# Altium PCB Trans_V2.3.PcbDoc
Units mil, origin at the board's own origin, x right, y up, seen from the top; angles counter-clockwise.
Board outline 7874.02 x 3937.01 mil, 2 copper layers (Top Layer, Bottom Layer), stack 12.8 mil thick; 108 components, 89 nets, 455 pads, 118 vias.
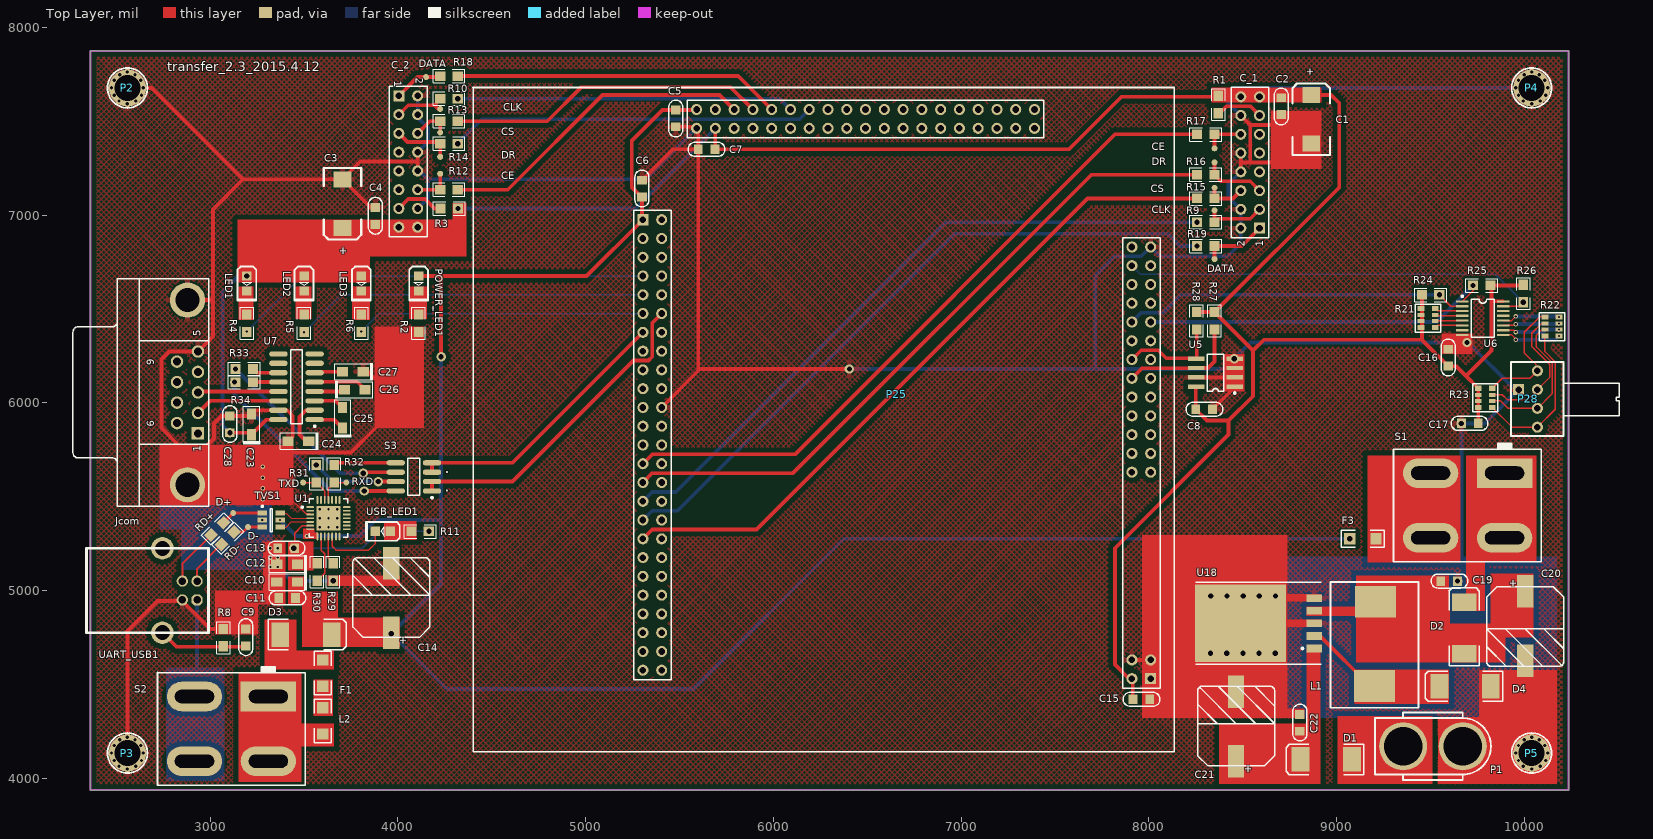
[diagram p0: Top Layer view]
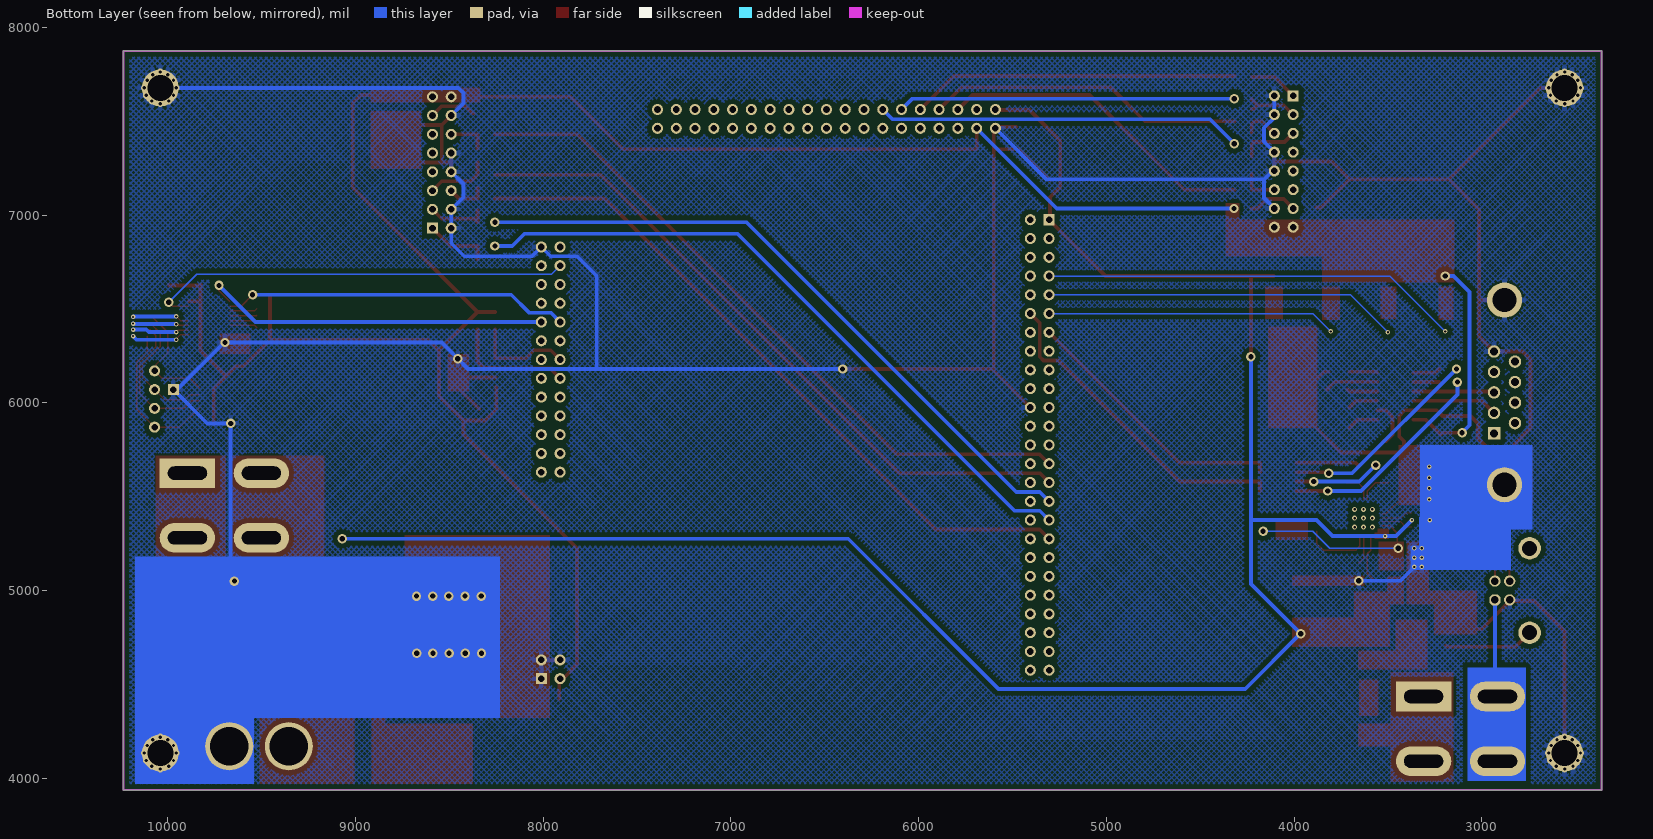
[diagram p1: Bottom Layer view, seen from below]

## Layer stack, top to bottom
Top Solder: solder mask 0.4, Solder Resist, Dk 3.5
Top Layer: signal copper 1.4
Dielectric1: core 10, FR-4, Dk 4.2
Bottom Layer: signal copper 1.4
Bottom Solder: solder mask 0.4, Solder Resist, Dk 3.5

## Board outline
2362.2,3937.01 10236.22,3937.01 10236.22,7874.02 2362.2,7874.02

## Design rules (kind name [scope] priority, off if disabled: settings)
Clearance Clearance_1 [InPolygon And InNet('GND')] p1: gap=25 ignorepadtopadclearanceinfootprint=FALSE except(0: Arc-Hole Track-Hole SMDPad-Hole THPad-Hole Via-Hole Fill-Hole Poly-Hole Region-Hole Text-Hole)
Clearance [All] p2: gap=6 ignorepadtopadclearanceinfootprint=FALSE except(0: Arc-Hole Track-Hole SMDPad-Hole THPad-Hole Via-Hole Fill-Hole Poly-Hole Region-Hole Text-Hole)
ComponentClearance [All] p1 off: gap=10 collisioncheckmode=3 verticalgap=10 showdistances=FALSE
DiffPairsRouting DiffPair_DiffPairsRouting [InDifferentialPair ('D3')] p1: maxlimit=6 minlimit=6 mostfreqgap=6 toplayer_minwidth=15 toplayer_maxwidth=15 toplayer_prefwidth=15 bottomlayer_minwidth=15 bottomlayer_maxwidth=15 bottomlayer_prefwidth=15 maxuncoupledlength=500
DiffPairsRouting DiffPair_DiffPairsRouting_1 [InDifferentialPair ('D1')] p2: maxlimit=10 minlimit=10 mostfreqgap=10 toplayer_minwidth=15 toplayer_maxwidth=15 toplayer_prefwidth=15 bottomlayer_minwidth=15 bottomlayer_maxwidth=15 bottomlayer_prefwidth=15 maxuncoupledlength=500
DiffPairsRouting [All] p3: maxlimit=10 minlimit=10 mostfreqgap=10 toplayer_minwidth=15 toplayer_maxwidth=15 toplayer_prefwidth=15 bottomlayer_minwidth=15 bottomlayer_maxwidth=15 bottomlayer_prefwidth=15 maxuncoupledlength=500
FabricationTestpoint [(IsPad And (OnTopLayer Or OnBottomLayer))] p1: side=3 testpointundercomponent=TRUE minsize=40 maxsize=100 preferedsize=60 minholesize=0 maxholesize=40 preferedholesize=32 testpointgrid=1 allowsidetop=TRUE allowsidebottom=TRUE usegrid=TRUE gridtolerance=0.01
HoleSize [All] p1: absolutevalues=TRUE maxlimit=300 minlimit=1 maxpercent=80.000 minpercent=20.000
HoleToHoleClearance [All] p1: gap=1 allowstackedmicrovias=TRUE
MatchedLengths DiffPair_MatchedLengths [InDifferentialPair ('D3')] p1: tolerance=1000 checknetsindiffpair=TRUE checkdiffpairvsdiffpair=FALSE checkxsignals=FALSE checkothers=FALSE
MatchedLengths DiffPair_MatchedLengths_1 [InDifferentialPair ('D1')] p2: tolerance=1000 checknetsindiffpair=TRUE checkdiffpairvsdiffpair=FALSE checkxsignals=FALSE checkothers=FALSE
MinimumSolderMaskSliver [All] p1: minsoldermaskwidth=1
PolygonConnect [All] p1: connectstyle=Relief reliefconductorwidth=25 reliefentries=4 polygonreliefangle="90 Angle" airgapwidth=10
RoutingVias [All] p1: holewidth=28 width=50 viastyle="Through Hole" minholewidth=12 minwidth=25 maxholewidth=28 maxwidth=50
SilkToSilkClearance [All] p1: silktosilkclearance=1
SilkToSolderMaskClearance SilkscreenOverComponentPads [IsPad] p1: minsilkscreentomaskgap=0 clearancetoexposedcopper=TRUE
SolderMaskExpansion [All] p1: expansion=4
Width [All] p1: maxlimit=30 minlimit=6 preferedwidth=20
22 further rules are at their usual default settings.

## Classes and differential pairs
differential pair D3: +D3_P -D3_N
differential pair D2: +D2_P -D2_N
differential pair D1: +D1_P -D1_N

## Components (designator, comment, footprint, x,y, rotation, side; value= is the part's Value field where it differs from the comment)
C1 "47u" 7343c/d 8865,7640 r270 top
C2 "0.1uF" 0805C 8705,7535 r90 top
C3 "47u" 7343C/D 3705,6930 r90 top
C4 "0.1uF" 0805C 3880,7040 r270 top
C5 "0.1uF" 0805C 5480,7470 r90 top
C6 "0.1uF" 0805C 5300,7185 r270 top
C7 "0.1uF" 0805C 5600,7350 r0 top
C8 "0.1uF" 0805C 8340,5965 r180 top
C9 "100nF/16V" 0805C 3190,4795 r270 top
C10 "1u" CAP-3216 3410,5045 r180 top
C11 "0.1uF" 0805C 3455,4960 r180 top
C12 "4.7uF/16V" CAP-3216 3410,5140 r180 top
C13 "0.1uF/16V" 0805C 3450,5225 r180 top
C14 "470u" J10 3965,4775 r90 top
C15 "0.1uF" 0805C 8005,4420 r180 top
C16 "0.1uF" 0805C 9595,6285 r270 top
C17 "0.1uF" 0805C 9665,5890 r0 top
C19 "0.1uF" 0805C 9645,5050 r180 top
C20 "470uF" J10 10005,4995 r270 top
C21 "470uF" J10 8465,4090 r90 top
C22 "0.1uF" 0805C 8805,4340 r270 top
C23 "Cap Pol1" CAP-3216 3220,5885 r90 top
C24 "Cap Pol1" CAP-3216 3470,5795 r180 top
C25 "Cap Pol1" CAP-3216 3705,5920 r90 top
C26 "Cap Pol1" CAP-3216 3770,6070 r0 top
C27 "Cap Pol1" CAP-3216 3760,6165 r180 top
C28 "Cap" 0805C 3105,5930 r270 top
C_1 "nRF2401" HDR2X8 8590,6930 r90 top
C_2 "nRF2401" HDR2X8 4005,7635 r270 top
CE "*" TestPoint 8350,7355 r90 top (schematic designator P14)
CE "*" TestPoint 4225,7220 r90 top (schematic designator P21)
CLK "*" TestPoint 8350,7025 r90 top (schematic designator P12)
CLK "*" TestPoint 4225,7565 r90 top (schematic designator P18)
CS "*" TestPoint 8350,7145 r90 top (schematic designator P16)
CS "*" TestPoint 4225,7440 r90 top (schematic designator P20)
D1 "SS36" SMC 8945,4100 r180 top
D2 "SS36" SMC 9680,4800 r90 top
D3 "SS36" SMC 3510,4765 r0 top
D4 "SS36" SMC 9685,4490 r180 top
D+ "*" TestPoint 3122.4,5412.4 r0 top (schematic designator P8)
D- "*" TestPoint 3201.84,5337.6 r0 top (schematic designator P9)
DATA "*" TestPoint 4150,7735 r90 top (schematic designator P17)
DATA "*" TestPoint 8350,6765 r90 top (schematic designator P15)
DR "*" TestPoint 8350,7280 r90 top (schematic designator P13)
DR "*" TestPoint 4225,7310 r90 top (schematic designator P19)
F1 "Fuse 2" 1206 3600,4560 r90 top
F3 "Fuse 3" 1206 9140,5275 r180 top
Jcom "D Connector 9" DSUB1.385-2H9 2505,6055 r90 top
L1 "Inductor" L 9130,4680 r90 top
L2 "Inductor" 1206 3600,4305 r90 top
LED1 "LED1" 0805D 3195,6675 r270 top
LED2 "LED2" 0805D 3500,6675 r270 top
LED3 "LED3" 0805D 3805,6675 r270 top
P1 "Header 2" DC3 9355,4170 r0 top
P2 "*" 安装孔-3.5-5 2559.06,7677.17 r0 top
P3 "*" 安装孔-3.5-5 2559.06,4133.86 r0 top
P4 "*" 安装孔-3.5-5 10039.37,7677.17 r0 top
P5 "*" 安装孔-3.5-5 10039.37,4133.86 r0 top
P25 "CONNECTOR_FPGA" CONNECTOR_FPGA 5305,6975 r90 top
P28 "COAX-M" A6RV-161RS 9970,6070 r90 top
POWER_LED1 "LED2" 0805D 4110,6675 r270 top
R1 "1k" 0805R 8370,7635 r270 top
R2 "1K" 0805R 4110,6470 r270 top
R3 "1K" 0805R 4320,7035 r180 top
R4 "1K" 0805R 3195,6470 r270 top
R5 "1k" 0805R 3500,6470 r270 top
R6 "1k" 0805R 3805,6470 r270 top
R8 "1M" 0805R 3070,4795 r270 top
R9 "22" 0805R 8350,6961.67 r180 top
R10 "22" 0805R 4225,7620 r0 top
R11 "1K" 0805R 4165,5315 r180 top
R12 "22" 0805R 4225,7135 r0 top
R13 "22" 0805R 4225,7500 r0 top
R14 "22" 0805R 4318,7380 r180 top
R15 "22" 0805R 8350,7088.33 r180 top
R16 "22" 0805R 8257,7215 r0 top
R17 "22" 0805R 8350,7430 r180 top
R18 "22" 0805R 4225,7740 r0 top
R19 "22" 0805R 8350,6835 r180 top
R21 "2K" 0603排阻 9525,6400 r180 top
R22 "22" 0603排阻 10185,6355 r180 top
R23 "10k" 0603排阻 9830,5975 r180 top
R24 "1.6K" 0805R 9455,6575 r0 top
R25 "1.6K" 0805R 9820,6625 r180 top
R26 "1K" 0805R 9995,6535 r90 top
R27 "10k" 0805R 8350,6390 r90 top
R28 "10k" 0805R 8255,6390 r90 top
R29 "Res1" 0805R 3655,5145 r270 top
R30 "Res1" 0805R 3570,5145 r270 top
R31 "Res1" 0805R 3565,5575 r90 top
R32 "Res1" 0805R 3660,5575 r90 top
R33 "Res1" 0805R 3135,6180 r0 top
R34 "Res1" 0805R 3135,6110 r0 top
RD+ "Res1" 0805R 3005,5295 r45 top
RD- "Res1" 0805R 3060,5245 r45 top
RXD "*" TestPoint 3725,5575 r90 top (schematic designator P11)
S1 "power1" A8L-21-11N2 9895,5625 r180 top
S2 "power2" A8L-21-11N2 3310,4435 r180 top
S3 "SW DIP-4" SO8_M 4085,5605 r180 top
TVS1 "USBLC6-2SC6" SOT23-6_M 3325,5375 r0 top
TXD "*" TestPoint 3495,5575 r90 top (schematic designator P10)
U1 "cp2102" QFN50P500X500-28VAM 3630,5385 r0 top
U5 "AT24C8" SO-G8 8355,6160 r90 top
U6 "PCA9557PW" TSSOP16 9670,6540 r0 top
U7 "MAX3232CSE" NSO16_M 3460,6085 r180 top
U18 "LM2576T-5.0" D2PAK 8715,4825 r90 top
UART_USB1 "UART-USB" USB-B 2930,4950 r270 top
USB_LED1 "LED2" 0805D 3960,5315 r180 top

## Footprints (in the part's own frame and the unit in brackets; to place one, negate y for a bottom-side part, rotate by r counter-clockwise, add the part's x,y. Pads: shape width x height; smd on the part's side, far side on the other; paste and mask are expansions set on the pad)
0603排阻 [mm]
  rect 0.9x0.7 smd: 1(0,0) 2(1.9,0) 7(0,-2.591) 8(1.9,-2.591)
  rect 0.9x0.55 smd: 3(0,-0.889) 4(1.9,-0.889) 5(0,-1.702) 6(1.9,-1.702)
  silkscreen extent -0.76,-3.17 2.67,0.61
0805C [mm]
  rect 1.2x1.3 smd: 1(0,0) 2(2.286,0)
  silkscreen extent -1.37,-0.95 3.59,0.95
0805D [mil] "二?"
  rect 50x50 smd: 1(0,0) 2(80,0)
  silkscreen extent -50,-50 130,50
0805R [mm]
  rect 1.4x1.3 smd: 1(0,0) 2(2.362,0)
  silkscreen extent -0.97,-0.91 3.33,0.91
1206 [mil] "贴片?"
  rect 60x60 smd: 1(-70,0) 2(70,0)
  silkscreen extent -115,-45 115,45, body extent -75,-35 75,35, height 39
7343c/d [mm] "钽?"
  rect 2.16x2.41 smd: 1(0,0) 2(6.61,0)
  silkscreen extent -1.52,-2.54 8.13,2.54
7343C/D [mm] "钽?"
  rect 2.16x2.41 smd: 1(0,0) 2(6.61,0)
  silkscreen extent -1.52,-2.54 8.13,2.54
A6RV-161RS [mm] "旋转"
  rect 1.5x1.5 hole 0.9: 1(0,0)
  round 1.5 hole 0.9: 2(-5.08,-2.54) 3(-2.54,-2.54) 4(0,-2.54) 5(2.54,-2.54)
  silkscreen extent -6.27,-13.59 3.73,1.02
A8L-21-11N2 [mm]
  rect 7.5x4 hole 1.8 slot 5.3 at 0 deg: 1(0,0)
  oval 7.5x4 hole 1.8 slot 5.3 at 0 deg: 2(10,0) 3(0,8.75) 4(10,8.75)
  silkscreen extent -5,-4.02 15,12
CAP-3216 [mil] "钽电"
  rect 60x50 smd: 1(-55,0) 2(55,0)
  silkscreen extent -106,-48 96,46
CONNECTOR_FPGA [mm]
  rect 1.5x1.5 hole 0.9: 1(0,0) 51(-62.103,-68.707)
  round 1.5 hole 0.9: 2(0,-2.54) 3(-2.54,0) 4(-2.54,-2.54) 5(-5.08,0) 6(-5.08,-2.54) 7(-7.62,0) 8(-7.62,-2.54) 9(-10.16,0) 10(-10.16,-2.54) 11(-12.7,0) 12(-12.7,-2.54) 13(-15.24,0) 14(-15.24,-2.54) 15(-17.78,0) 16(-17.78,-2.54) 17(-20.32,0) 18(-20.32,-2.54) 19(-22.86,0) 20(-22.86,-2.54) 21(-25.4,0) 22(-25.4,-2.54) 23(-27.94,0) 24(-27.94,-2.54) 25(-30.48,0) 26(-30.48,-2.54) 27(-33.02,0) 28(-33.02,-2.54) 29(-35.56,0) 30(-35.56,-2.54) 31(-38.1,0) 32(-38.1,-2.54) 33(-40.64,0) 34(-40.64,-2.54) 35(-43.18,0) 36(-43.18,-2.54) 37(-45.72,0) 38(-45.72,-2.54) 39(-48.26,0) 40(-48.26,-2.54) 41(-50.8,0) 42(-50.8,-2.54) 43(-53.34,0) 44(-53.34,-2.54) 45(-55.88,0) 46(-55.88,-2.54) 47(-58.42,0) 48(-58.42,-2.54) 49(-60.96,0) 50(-60.96,-2.54) 52(-62.103,-66.167) 53(-59.563,-68.707) 54(-59.563,-66.167) 73(-34.163,-68.707) 74(-34.163,-66.167) 75(-31.623,-68.707) 76(-31.623,-66.167) 77(-29.083,-68.707) 78(-29.083,-66.167) 79(-26.543,-68.707) 80(-26.543,-66.167) 81(-24.003,-68.707) 82(-24.003,-66.167) 83(-21.463,-68.707) 84(-21.463,-66.167) 85(-18.923,-68.707) 86(-18.923,-66.167) 87(-16.383,-68.707) 88(-16.383,-66.167) 89(-13.843,-68.707) 90(-13.843,-66.167) 91(-11.303,-68.707) 92(-11.303,-66.167) 93(-8.763,-68.707) 94(-8.763,-66.167) 95(-6.223,-68.707) 96(-6.223,-66.167) 97(-3.683,-68.707) 98(-3.683,-66.167) 113(14.91,-52.984) 114(12.37,-52.984) 115(14.91,-50.444) 116(12.37,-50.444) 117(14.91,-47.904) 118(12.37,-47.904) 119(14.91,-45.364) 120(12.37,-45.364) 121(14.91,-42.824) 122(12.37,-42.824) 123(14.91,-40.284) 124(12.37,-40.284) 125(14.91,-37.744) 126(12.37,-37.744) 127(14.91,-35.204) 128(12.37,-35.204) 129(14.91,-32.664) 130(12.37,-32.664) 131(14.91,-30.124) 132(12.37,-30.124) 133(14.91,-27.584) 134(12.37,-27.584) 135(14.91,-25.044) 136(12.37,-25.044) 137(14.91,-22.504) 138(12.37,-22.504) 139(14.91,-19.964) 140(12.37,-19.964) 141(14.91,-17.424) 142(12.37,-17.424) 143(14.91,-14.884) 144(12.37,-14.884) 145(14.91,-12.344) 146(12.37,-12.344) 147(14.91,-9.804) 148(12.37,-9.804) 149(14.91,-7.264) 150(12.37,-7.264)
  silkscreen extent -72.01,-71.88 17.91,22.99
D2PAK [mm]
  rect 1.05x2.1 smd: 1(-3.4,-4.225) 2(-1.7,-4.225) 3(0,-4.225) 4(1.7,-4.225) 5(3.4,-4.225)
  rect 10.5x12.3 smd: 6(0,5.766)
  silkscreen extent -5.55,-5.17 5.56,11.83
DC3 [mm] "DUALSKY电?"
  round 6.5 hole 5.2: 1(0,0) 2(8.06,0)
  silkscreen extent -3.81,-4.57 11.87,4.57
DSUB1.385-2H9 [mm] "Connector; D Subminiature; 9 Position; Right Angle; Pitch 1.385 mm"
  rect 1.69x1.69 hole 1.09: 1(-5.54,-10.92)
  round 1.69 hole 1.09: 2(-2.77,-10.92) 3(0,-10.92) 4(2.77,-10.92) 5(5.54,-10.92) 6(-4.155,-8.08) 7(-1.385,-8.08) 8(1.385,-8.08) 9(4.155,-8.08)
  round 4.76 hole 3.26: 10(-12.495,-9.5) 11(12.495,-9.5)
  silkscreen extent -15.4,-12.4 15.4,6
HDR2X8 [mm] "Connector; Header; 8x2 Position"
  rect 1.5x1.5 hole 0.9: 1(0,0)
  round 1.5 hole 0.9: 2(0,2.54) 3(2.54,0) 4(2.54,2.54) 5(5.08,0) 6(5.08,2.54) 7(7.62,0) 8(7.62,2.54) 9(10.16,0) 10(10.16,2.54) 11(12.7,0) 12(12.7,2.54) 13(15.24,0) 14(15.24,2.54) 15(17.78,0) 16(17.78,2.54)
  silkscreen extent -1.27,-1.27 19.05,3.81
J10 [mm] "贴片点?"
  rect 4.4x2.2 smd: 1(0,0) 2(9.398,0)
  silkscreen extent -0.64,-5.21 10.16,5.21
L [mil]
  rect 170x220 smd: 1(-190,-72.5) 2(260,-77.5)
  silkscreen extent -305,-308 365,163
NSO16_M [mm] "SOIC, 16-Leads, Body 9.9x3.9mm, Pitch 1.27mm, IPC Low Density"
  oval 2.5x0.7 smd: 1(-2.45,4.445) 2(-2.45,3.175) 3(-2.45,1.905) 4(-2.45,0.635) 5(-2.45,-0.635) 6(-2.45,-1.905) 7(-2.45,-3.175) 8(-2.45,-4.445) 9(2.45,-4.445) 10(2.45,-3.175) 11(2.45,-1.905) 12(2.45,-0.635) 13(2.45,0.635) 14(2.45,1.905) 15(2.45,3.175) 16(2.45,4.445)
  silkscreen extent -2.58,-5 0.8,5.47, body extent -2,-5 2,5, height 1.75
QFN50P500X500-28VAM [mm] "28-Pin Plastic Quad Flat No-Lead 0.5 mm Pitch"
  oval 1.05x0.25 smd: 1(-2.475,1.5) 2(-2.475,1) 3(-2.475,0.5) 4(-2.475,0) 5(-2.475,-0.5) 6(-2.475,-1) 7(-2.475,-1.5) 15(2.475,-1.5) 16(2.475,-1) 17(2.475,-0.5) 18(2.475,0) 19(2.475,0.5) 20(2.475,1) 21(2.475,1.5)
  oval 0.25x1.05 smd: 8(-1.5,-2.475) 9(-1,-2.475) 10(-0.5,-2.475) 11(0,-2.475) 12(0.5,-2.475) 13(1,-2.475) 14(1.5,-2.475) 22(1.5,2.475) 23(1,2.475) 24(0.5,2.475) 25(0,2.475) 26(-0.5,2.475) 27(-1,2.475) 28(-1.5,2.475)
  rect 3.3x3.3 smd: 29(0,0)
  silkscreen extent -3.67,-2.6 2.6,2.6, body extent -2.58,-2.58 2.58,2.58, height 1
SMC [mm] "DO-214-AB/SMC; 2 C-Bend Leads; Body 7.9 x 5.9 mm, inc. leads (LxW)"
  rect 2.4x3.3 smd: 1(-3.475,0) 2(3.475,0)
  silkscreen extent -5.07,-2.05 5.43,2.05
SO8_M [mm] "SOIC, 8-Leads, Body 4.9x3.9mm, Pitch 1.27mm, IPC Low Density"
  oval 2.5x0.7 smd: 1(-2.45,1.905) 2(-2.45,0.635) 3(-2.45,-0.635) 4(-2.45,-1.905) 5(2.45,-1.905) 6(2.45,-0.635) 7(2.45,0.635) 8(2.45,1.905)
  silkscreen extent -2.58,-2.5 0.8,2.93, body extent -2,-2.5 2,2.5, height 1.75
SO-G8 [mm] "Small Outline; 8 Leads; Body Width 3.9 mm; Pitch 1.27 mm"
  rect 0.6x2.2 smd: 1(-1.905,-2.6) 2(-0.635,-2.6) 3(0.635,-2.6) 4(1.905,-2.6) 5(1.905,2.6) 6(0.635,2.6) 7(-0.635,2.6) 8(-1.905,2.6)
  silkscreen extent -2.88,-2.72 2.5,1.1
SOT23-6_M [mm] "SOT23, 6-Leads, Body 2.9x1.6mm, Pitch 0.95mm, Lead Span 2.7mm, IPC Low Density"
  rect 1.3x0.7 smd: 1(-1.2,0.95) 2(-1.2,0) 3(-1.2,-0.95) 4(1.2,-0.95) 5(1.2,0) 6(1.2,0.95)
  silkscreen extent -1.32,-1.55 0.15,1.97, body extent -0.9,-1.55 0.9,1.55, height 1.45
TestPoint [mm]
  round 0.8 smd: 1(0,0)
TSSOP16 [mm]
  rect 1.65x0.3 smd: 1(0,0) 2(0,-0.65) 3(0,-1.3) 4(0,-1.95) 5(0,-2.6) 6(0,-3.25) 7(0,-3.9) 8(0,-4.55) 9(5.55,-4.55) 10(5.55,-3.9) 11(5.55,-3.25) 12(5.55,-2.6) 13(5.55,-1.95) 14(5.55,-1.3) 15(5.55,-0.65) 16(5.55,0)
  silkscreen extent -0.12,-4.82 4.33,0.82
USB-B [mil]
  oct 60x60 hole 40: 1(0.24,0.17)
  round 60 hole 40: 2(-99.76,0.17) 3(-99.76,-78.57) 4(0.24,-78.57)
  round 120 hole 80: 5(175.24,-184.87) 6(-274.76,-184.87)
  silkscreen extent -275,-589 175,61
安装孔-3.5-5 [mm]
  round 5 hole 3.5: 1(0,0)
  silkscreen extent -2.7,-2.7 2.7,2.7

## Part data
C1 C3 C10 C12 C14: library part "Cap Pol1", "Polarized Capacitor (Radial)"
C2 C4 C5 C6 C7 C8 C15 C16 C17 C19 C22: library part Cap, "Capacitor"
C9: library part CAP, "无极性"
C11 C13: library part CAP, "Capacitor"
C20 C21: library part Cap2, "25V 470uf 10*10"
C23 C24 C25 C26 C27: "Polarized Capacitor (Radial)"
C28: "Capacitor"
C_1 C_2: "2.4G, wireless"
CE CE CLK CLK CS CS D+ D- DATA DATA DR DR RXD TXD: library part Plug, "Plug"
D1 D2 D3 D4: library part Diode, "Default Diode"
F1: "Fuse"
F3: library part "Fuse 2", "Fuse"
Jcom: "Receptacle Assembly, 9 Position, Right Angle"
LED1 LED3: library part LED2, "Typical RED, GREEN, YELLOW, AMBER GaAs LED"
LED2 POWER_LED1 USB_LED1: "Typical RED, GREEN, YELLOW, AMBER GaAs LED"
P1: "Header, 2-Pin"
P2 P3 P4 P5: library part Plug, "Pl"
P25: library part CONNECTOR_FP
P28: "RF Coaxial PCB Connector, MMCX; Thru-Hole, Vertical Mount Plug,  50 Ohm Impedance"
R1 R3: library part Res2, "Resistor"
R2 R4 R5 R6 R11 R24 R25 R26: library part Res1, "Resistor"
R8: library part RE, "电阻"
R9 R10 R12 R13 R14 R15 R16 R17 R18 R19 R27 R28: library part SR0805, "Resistance"
R21 R22 R23: library part 0805
R29 R30 R31 R32 R33 R34 RD+ RD-: "Resistor"
S1 S2: library part "Header 2X2", "Header, 2-Pin, Dual row"
S3: "DIP Switch, 4 Position, SPST"
U7: "3.0V TO 5.5V, Low-Power, up to 1Mbps, True RS-232 Transceiver Using Four 0.1礔 External Capacitor"
U18: library part LM2575T-5.0, "Simple Switcher 1A Step Down Voltage Regulator"

## Via types
v1: diameter 36, hole 18, Top Layer to Bottom Layer, 48 vias
v2: diameter 50, hole 28, Top Layer to Bottom Layer, 37 vias
v3: diameter 24, hole 12, Top Layer to Bottom Layer, 24 vias
v4: diameter 25.98, hole 12.99, Top Layer to Bottom Layer, tented top, 9 vias

## Nets (pads, with @x,y where several pads share a name; then routed paths per layer and width w, separated by ;. In a path a pad name is that pad's centre, name@x,y a point inside that pad or via, vN(x,y) a via of type N, cw(c..) or ccw(c..) an arc to the next point about the centre after c; other vN are vias at no path point)
232_RXD: R33.1 S3.6 | length 1083.4
  Top Layer w20: v2@3815,5630 S3.6
  Bottom Layer w20: v2(3135,6180) 3690,5625 v2(3815,5625)
232_TXD: R34.1 S3.8 | length 1137.7
  Top Layer w20: v2(3820,5530) S3.8
  Bottom Layer w20: v2(3130,6110) 3130,6043.6 3643.6,5530 v2(3820,5530)
+3.3V: C1.1 C2.2 C3.1 C4.2 C7.2 C8.2 C15.2 C16.2 C17.2 C23.1 C28.2 C_1.15 C_1.16 C_2.15 C_2.16 LED1.1 LED2.1 LED3.1 P25.52 P25.148 R1.1 R3.1 R21.2 R21.4 R21.6 R21.8 R23.2 R23.4 R23.6 R23.8 R24.1 R25.1 R26.2 R27.2 R28.2 U5.8 U6.16 U7.16 | length 12910
  Top Layer w20: v2(3105,5840) 3210,5840 C23.1 3300,5910 U7.16 ; P25.148 5690,7461 C7.2 7575,7350 7855,7630 C_1.16 C_1.15 ; C15.2 7915,4525 P25.52 7895,4530 7820,4605 7820,5225 8425,5830 8425,5905 ; U5.8 8250,6082.36 C8.2 8310,5905 8425,5905 ; R28.2 R27.2 ; C1.1 8970,7640 9015,7595 9015,7148 R27.2 ; R24.1 9455,6335 ; C17.2 R23.2@9755,5974.8 ; R23.2 R23.4 R23.6 R23.8 9690,6142.2 ; R25.1@9823,6628 R25.1@9826,6625 ; 9826,6540 U6.16 ; R26.2 9992,6625 R25.1@9826,6625 ; R27.2 8555,6278 ; 8425,5905 8555,6035 8555,6278 ; 8555,6278 8612,6335 9455,6335 ; 9455,6335 C16.2 9637.2,6195 9690,6142.2 ; 9690,6142.2 9826,6278.2 R25.1@9826,6625
  Bottom Layer w20: v2(3105,5840) 3065,5880 3065,6590 3150,6675 v2(3195,6675) ; v2(4320,7035) 5264,7035 P25.148
+5V: C5.2 C6.2 C10.1 C11.1 C14.1 D3.2 F3.2 P25.1 P25.149 POWER_LED1.1 TVS1.5 U1.7 U1.8 | length 10710.8
  Top Layer w8: C10.1 C10.1@3470,5045
  Top Layer w20: POWER_LED1.1 4230,6675 ; v2(4230,6245) 4230,6675 ; P25.149 5589,7560 C5.2 5410,7560 5245,7395 5245,7150 C6.2 5300,6980 P25.1 5005,6675 4230,6675
  Bottom Layer w20: v3(3372.24,5375) 3457.24,5290 v3(3515,5290) 3795,5290 3880,5375 4230,5375 ; 4230,5660 v2(4230,6245) ; 4230,5685 4230,5035 v2(3965,4770) 4260,4475 5575,4475 6375,5275 v2(9070,5275)
+5V1: D2.2 S1.1 S1.3
BATTERY_16: D1.1 P1.1
C1_CE: P25.27 R17.2 | length 3678.9
  Top Layer w20: P25.27 5355,5725 6115,5725 7820,7430 R17.2
C1_CEO: C_1.12 CE.1@8350,7355 R17.1 | length 215
  Top Layer w20: CE.1@8350,7355 R17.1 C_1.12
C1_CLK: P25.31 R9.2 | length 3567.8
  Bottom Layer w20: P25.31 5355,5525 5480,5525 6916.67,6961.67 v2(8257,6961.67)
C1_CLKO: C_1.3 CLK.1@8350,7025 R9.1 | length 331.6
  Top Layer w20: CLK.1@8350,7025 R9.1 8368.33,6980 8540,6980 C_1.3
C1_CS: P25.35 R15.2 | length 3703.1
  Top Layer w20: P25.35 5355,5325 5910,5325 7673.33,7088.33 R15.2
C1_CSO: C_1.6 CS.1@8350,7145 R15.1 | length 213.9
  Top Layer w20: CS.1@8350,7145 R15.1 8448.33,7088.33 C_1.6
C1_DATA: P25.33 R19.2 | length 3610.6
  Bottom Layer w20: P25.33 5355,5425 5490,5425 6965,6900 8100,6900 8165,6835 v2(8257,6835)
C1_DATAO: C_1.1 DATA.1@8350,6765 R19.1 | length 349.4
  Top Layer w20: DATA.1@8350,6765 R19.1 8495,6835 C_1.1
C1_DR: P25.29 R16.1 | length 3631.3
  Top Layer w20: P25.29 5355,5625 6105,5625 7695,7215 R16.1
C1_DRO: C_1.5 DR.1@8350,7280 R16.2 | length 340.2
  Top Layer w20: DR.1@8350,7280 R16.2 8385,7180 8540,7180 C_1.5
C2_CE: P25.145 R12.2 | length 1714.5
  Top Layer w20: R12.2 4585,7135 5090,7640 5713,7640 P25.145
C2_CEO: C_2.12 CE.1@4225,7220 R12.1 | length 205
  Top Layer w20: C_2.12 R12.1 CE.1@4225,7220
C2_CLK: P25.139 R10.2 | length 1797
  Bottom Layer w20: v2(4318,7620) 6033,7620 P25.139
C2_CLKO: C_2.3 CLK.1@4225,7565 R10.1 | length 296.4
  Top Layer w20: C_2.3 4055,7585 4195,7585 ; CLK.1@4225,7565 4215,7565 4195,7585 ; R10.1 4225,7615 4195,7585
C2_CS: P25.143 R13.2 | length 1696.4
  Top Layer w20: R13.2 4795,7500 4975,7680 5773,7680 P25.143
C2_CSO: C_2.6 CS.1@4225,7440 R13.1 | length 198.1
  Top Layer w20: C_2.6 4170,7500 4210,7500 4225,7485 CS.1@4225,7440
C2_DATA: P25.141 R18.2 | length 1746.7
  Top Layer w20: R18.2 5813,7740 P25.141
C2_DATAO: C_2.1 DATA.1@4150,7735 R18.1 | length 261.4
  Top Layer w20: C_2.1 4105,7735 R18.1@4225,7735
C2_DR: P25.137 R14.1 | length 1948.4
  Bottom Layer w20: v2(4318,7380) 4448,7510 6139,7510 P25.137
C2_DRO: C_2.5 DR.1@4225,7310 R14.2 | length 297.3
  Top Layer w20: C_2.5 4051.53,7388.47 R14.2@4216.53,7388.47 ; DR.1@4225,7310 R14.2@4225,7376.5
CLK_24: P25.84 R27.1 U5.6 | length 647.3
  Top Layer w20: P25.84 7963.47,6183.47 8251.11,6183.47 U5.6 8315,6185 8350,6220 R27.1
D1_N: RD-.1 UART_USB1.2 | length 249
  Top Layer w10: UART_USB1.2 2930.17,5115.17 RD-.1
D1_P: RD+.1 UART_USB1.3 | length 308.9
  Top Layer w10: UART_USB1.3 2851.43,5141.43 RD+.1
D2_N: D-.1 RD-.2 TVS1.3 | length 163.1
  Top Layer w15: RD-.2 3175,5310.76 D-.1 TVS1.3
D2_P: D+.1 RD+.2 TVS1.1 | length 228.4
  Top Layer w15: RD+.2 D+.1 TVS1.1
D3_N: TVS1.4 U1.5 | length 171.8
  Top Layer w6: TVS1.4 3405,5337.6 3432.72,5365.31 U1.5
D3_P: TVS1.6 U1.4 | length 171.7
  Top Layer w6: TVS1.6 3405,5412.4 3432.4,5385 U1.4
DATA_24: P25.86 R28.1 U5.5 | length 536
  Top Layer w20: P25.86 7960,6280 8050,6280 8092.64,6237.36 8255,6237.36 R28.1
GND: C1.2 C2.1 C3.2 C4.1 C5.1 C6.1 C7.1 C8.1 C9.1 C10.2 C11.2 C12.2 C13.2 C14.2 C15.1 C16.1 C17.1 C19.1 C20.2 C21.2 C22.1 C23.2 C24.2 C27.1 C28.1 C_1.2 C_1.4 C_1.8 C_1.10 C_1.14 C_2.2 C_2.4 C_2.8 C_2.10 C_2.14 D4.1 Jcom.5 Jcom.10 Jcom.11 P1.2 P2.1 P3.1 P4.1 P5.1 P25.22 P25.51 P25.53 P25.54 P25.97 P25.150 P28.1 R2.2 R8.1 R29.2 TVS1.2 U1.3 U5.1 U5.2 U5.3 U5.4 U5.7 U6.8 U7.15 U18.3 U18.5 U18.6 UART_USB1.4 | length 23126
  Top Layer w8: C24.2 3415,5503.67 3510.22,5408.45 3528.8,5408.45 U1.3 ; U6.8 v2@9710,6320.87
  Top Layer w20: P3.1 v1(2559.06,4218.86) 2559.06,4784.06 2718.57,4943.57 2851.43,4943.57 3000,4795 R8.1 C9.1 ; P2.1 v1(2644.06,7677.17) 2688.31,7677.17 3175.24,7190.24 ; Jcom.11 3013.07,6546.93 3015,6545 ; C27.1 3840,6165 3890,6115 3890,5875 3750,5735 3440,5735 3415,5760 C24.2 3440,5820 3440,5930 3410,5960 U7.15 3240,5960 C23.2 3210,5930 C28.1 3060,5930 3020,5890 3020,5810 2975,5765 2840,5765 2740,5865 2740,6230 2783.11,6273.11 Jcom.5 3015,6353.19 3015,6545 ; C4.1 3855.24,7040 C3.2 ; C_2.10 4105,7285 ; C_2.8 4105,7285 ; C6.1 5465,7350 C7.1 ; P25.22 5600,6170 ; C5.1 5583,7470 P25.150 5600,7453 C7.1 ; v2(6405,6180) 5610,6180 5600,6170 ; P25.54 P25.53 P25.51 8005,4525 C15.1 ; U5.7 U5.2 ; C8.1 8457.36,6082.36 U5.1 ; C_1.8 8490,7280 ; C_1.10 8490,7280 ; C_1.14 8540,7480 ; C2.1 8650,7480 8540,7480 ; 8785.24,7280 8540,7280 ; 3015,6545 3015,7030 3175.24,7190.24 ; 3175.24,7190.24 C3.2 ; C3.2 3799.76,7285 4105,7285 ; 5600,6170 C7.1 ; 8490,7280 8540,7280 ; 8540,7280 8540,7480
  Bottom Layer w20: v3(3360,5125) 3433,5052 v2(3655,5052) ; C_2.14 4160,7090 4160,7190 ; C_2.10 4115,7235 4160,7190 ; C_2.8 4160,7390 4160,7465 4105,7520 C_2.4 C_2.2 ; P25.150 5319,7190 4160,7190 ; v2(6405,6180) 7715,6180 ; C_1.8 8425,7165 8425,7095 C_1.4 C_1.2 8490,6850 8420,6780 8060,6780 P25.97 7960,6780 7820,6780 7715,6675 7715,6180 ; C_1.14 8425,7595 8425,7650 8452.17,7677.17 v1(9954.37,7677.17) P4.1 ; v2(9645,5050) 9665.94,5070.94 9665.94,5889.06 v2(9665,5890) 9790,5890 P28.1 9950,6070 9699.13,6320.87 8540.87,6320.87 v2(8455,6235) 8400,6180 7715,6180
  other v1: 2559.06,4048.86 10039.37,4048.86 2514.06,4063.86 2604.06,4063.86 9994.37,4063.86 10084.37,4063.86 2489.06,4093.86 2634.06,4093.86 9969.37,4093.86 10114.37,4093.86 2474.06,4133.86 2644.06,4133.86 9954.37,4133.86 10124.37,4133.86 2489.06,4173.86 2629.06,4173.86 9969.37,4173.86 10109.37,4173.86 2519.06,4203.86 2599.06,4203.86 9999.37,4203.86 10079.37,4203.86 10039.37,4218.86 2559.06,7592.17 10039.37,7592.17 2514.06,7607.17 2604.06,7607.17 9994.37,7607.17 10084.37,7607.17 2489.06,7637.17 2634.06,7637.17 9969.37,7637.17 10114.37,7637.17 2474.06,7677.17 10124.37,7677.17 2489.06,7717.17 2629.06,7717.17 9969.37,7717.17 10109.37,7717.17 2519.06,7747.17 2599.06,7747.17 9999.37,7747.17 10079.37,7747.17 2559.06,7762.17 10039.37,7762.17
  other v2: 8328.75,4665 8415,4665 8501.25,4665 8587.5,4665 8673.75,4665 8330,4970 8416.25,4970 8502.5,4970 8588.75,4970 8675,4970 9695,6320.87
  other v3: 3320,5125 3320,5175 3360,5175 3320,5225 3360,5225 3277.76,5375 3280,5485 3280,5545 3280,5600 3280,5660
LED1: P25.7 R4.2 | length 2232.2
  Bottom Layer w8: v3(3195,6380) 3490,6675 P25.7
LED2: P25.9 R5.2 | length 1887.8
  Bottom Layer w8: v3(3500,6375) 3700,6575 P25.9
LED3: P25.11 R6.2 | length 1539.4
  Bottom Layer w8: v3(3805,6380) 3900,6475 P25.11
NetC9_2: C9.2 R8.2 UART_USB1.5 | length 477.9
  Top Layer w20: UART_USB1.5 2819.89,4700 3185,4700 C9.2
NetC12_1: C12.1 C13.1 R11.1 R30.1 U1.6 | length 936.7
  Top Layer w8: C13.1 3450,5305 3490.63,5345.63 U1.6
  Bottom Layer w8: v2(3445,5225) 3810,5225 3900,5315 v2(4165,5315)
NetC19_2: C19.2 C20.1 D2.1 L1.2 U18.4
NetC21_1: C21.1 C22.2 D1.2 U18.1
NetC24_1: C24.1 U7.2 | length 255.5
  Top Layer w20: C24.1 3510,5795 3475,5830 3475,5925 3510,5960 U7.2
NetC25_1: C25.1 U7.1 | length 167.2
  Top Layer w20: U7.1 3660,5910 C25.1
NetC25_2: C25.2 U7.3 | length 163
  Top Layer w20: U7.3 3670,6010 C25.2
NetC26_1: C26.1 U7.4 | length 162.7
  Top Layer w20: U7.4 3705,6060 C26.1
NetC26_2: C26.2 U7.5 | length 286.8
  Top Layer w20: U7.5 3558.46,6112 3783,6112 C26.2
NetC27_2: C27.2 U7.6 | length 150.6
  Top Layer w20: U7.6 3561.46,6165 C27.2
NetC_1_13: C_1.13 R1.2 | length 256.5
  Top Layer w20: R1.2 8377,7542 8415,7580 8540,7580 C_1.13
NetC_2_13: C_2.13 R3.2 | length 263.4
  Top Layer w20: C_2.13 4055,7085 4145,7085 4195,7035 R3.2
NetD3_1: D3.1 F1.2
NetD4_2: D4.2 L1.1 U18.2 | length 432.2
  Top Layer w20: U18.2 8911.93,4758.07 9180,4490 L1.1
NetF1_1: F1.1 L2.2
NetF3_1: F3.1 S1.2 S1.4
NetJcom_2: Jcom.2 U7.14 | length 455.2
  Top Layer w20: Jcom.2 2998.98,6010 U7.14
NetJcom_3: Jcom.3 U7.13 | length 430.7
  Top Layer w20: Jcom.3 2939.92,6060 U7.13
NetL2_1: L2.1 S2.1 S2.3
NetLED1_2: LED1.2 R4.1
NetLED2_2: LED2.2 R5.1
NetLED3_2: LED3.2 R6.1
NetP10_1: R31.1 TXD.1 U1.26 | length 181.3
  Top Layer w8: TXD.1 R31.1 3610.32,5529.69 U1.26
NetP11_1: R32.1 RXD.1 U1.25 | length 170
  Top Layer w8: U1.25 3630,5545 R32.1 RXD.1
NetPOWER_LED1_2: POWER_LED1.2 R2.1
NetR11_2: R11.2 USB_LED1.1
NetR21_1: R21.1 U6.6 | length 150
  Top Layer w8: R21.1 9537.05,6412.05 U6.6
NetR21_3: R21.3 U6.5 | length 146.1
  Top Layer w8: R21.3 9527.64,6437.64 U6.5
NetR21_5: R21.5 U6.4 | length 146.6
  Top Layer w8: R21.5 9528.77,6463.23 U6.4
NetR21_7: R21.7 U6.3 | length 150.5
  Top Layer w8: R21.7 9538.17,6488.83 U6.3
NetR22_1: R22.1 U6.9 | length 317
  Top Layer w8: U6.9 9934.13,6360.87 v3@9957.5,6337.5
  Bottom Layer w20: v3(9955,6335) 10165,6335 v3(10185,6355)
NetR22_3: R22.3 U6.10 | length 306.1
  Top Layer w8: U6.10 9945.21,6386.46 v3(9955,6376.67)
  Bottom Layer w20: v3(9955,6376.67) 10101.67,6376.67 10115,6390 v3(10185,6390)
NetR22_5: R22.5 U6.11 | length 300.6
  Top Layer w8: U6.11 9948.71,6412.05 v3(9955,6418.33)
  Bottom Layer w20: v3(9955,6418.33) 9956.17,6419.5 10182.5,6419.5 v3(10185,6422)
NetR22_7: R22.7 U6.12 | length 307
  Top Layer w8: U6.12 9932.64,6437.64 v3(9955,6460)
  Bottom Layer w20: v3(9955,6460) 10182,6460 v3(10185,6457)
NetR29_1: R29.1 U1.11 | length 152.9
  Top Layer w8: U1.11 3630,5170 R29.1
NetR30_2: R30.2 U1.9 | length 260.2
  Top Layer w8: R30.2 3610,5092 3610,5195 3590.63,5214.37 U1.9
NetR33_2: R33.2 U7.11 | length 143.8
  Top Layer w20: R33.2 3248,6160 U7.11
NetR34_2: R34.2 U7.12 | length 135.5
  Top Layer w20: R34.2 U7.12
NetS2_2: S2.2 S2.4 UART_USB1.1 | length 865
  Bottom Layer w20: S2.4 2930.17,4104.39 UART_USB1.1
NetU1_12: U1.12 USB_LED1.2 | length 370.5
  Top Layer w8: U1.12 3649.69,5235.31 3670,5215 3845,5215 3880,5250 USB_LED1.2
RESET_9557: P25.96 R26.1 U6.15 | length 2280.8
  Top Layer w8: U6.15 9974.41,6514.41 v2(9995,6535)
  Bottom Layer w8: P25.96 7955,6685 9845,6685 v2(9995,6535)
RXD: P25.13 S3.3 S3.4 | length 1461.4
  Top Layer w20: S3.3 S3.4 4610,5680 P25.13
S1: P28.5 R22.8 R23.7 | length 656.7
  Top Layer w8: R23.7 9883,6130 10030,6130 P28.5 10070,6195 10000,6265 10000,6375 10082,6457 R22.8
S2: P28.4 R22.6 R23.5 | length 732
  Top Layer w8: R23.5 9883,6042 9910,6015 10015,6015 P28.4 10135,6135 10135,6205 10040,6300 10040,6370 10092,6422 R22.6
S3: P28.3 R22.4 R23.3 | length 772.5
  Top Layer w8: R23.3 9875,6010 9915,5970 P28.3 10150,6050 10150,6211.21 10065,6296.21 10065,6360 10095,6390 R22.4
S4: P28.2 R22.2 R23.1 | length 830.5
  Top Layer w8: R23.1 9935,5870 P28.2 10165,5965 10165,6217.43 10110.2,6272.23 R22.2
SCL_9557: P25.89 R25.2 U6.1 | length 1906.4
  Top Layer w8: U6.1 9727,6597 v2(9727,6625)
  Bottom Layer w20: P25.89 9532,6430 v2(9727,6625)
SDA_9557: P25.90 R24.2 U6.2 | length 1845.2
  Top Layer w8: v2(9548,6575) 9608.59,6514.41 U6.2
  Bottom Layer w20: P25.90 7960,6480 8075,6480 8170,6575 v2(9548,6575)
TXD: P25.12 S3.1 S3.2 | length 1749.7
  Top Layer w20: S3.1 S3.2 4610,5580 5255,6225 5335,6225 5355,6245 5355,6425 P25.12
USB_RXD: R32.2 S3.5 | length 333.5
  Top Layer w20: R32.2 3672,5680 S3.5
USB_TXD: R31.2 S3.7 | length 460
  Top Layer w20: v2(3895,5580) S3.7
  Bottom Layer w20: v2(3565,5668) 3653,5580 v2(3895,5580)
pads on no net: C_1.7 C_1.9 C_1.11 C_2.7 C_2.9 C_2.11 Jcom.1 Jcom.4 Jcom.6 Jcom.7 Jcom.8 Jcom.9 P25.2 P25.3 P25.4 P25.5 P25.6 P25.8 P25.10 P25.14 P25.15 P25.16 P25.17 P25.18 P25.19 P25.20 P25.21 P25.23 P25.24 P25.25 P25.26 P25.28 P25.30 P25.32 P25.34 P25.36 P25.37 P25.38 P25.39 P25.40 P25.41 P25.42 P25.43 P25.44 P25.45 P25.46 P25.47 P25.48 P25.49 P25.50 P25.73 P25.74 P25.75 P25.76 P25.77 P25.78 P25.79 P25.80 P25.81 P25.82 P25.83 P25.85 P25.87 P25.88 P25.91 P25.92 P25.93 P25.94 P25.95 P25.98 P25.113 P25.114 P25.115 P25.116 P25.117 P25.118 P25.119 P25.120 P25.121 P25.122 P25.123 P25.124 P25.125 P25.126 P25.127 P25.128 P25.129 P25.130 P25.131 P25.132 P25.133 P25.134 P25.135 P25.136 P25.138 P25.140 P25.142 P25.144 P25.146 P25.147 U1.1 U1.2 U1.10 U1.13 U1.14 U1.15 U1.16 U1.17 U1.18 U1.19 U1.20 U1.21 U1.22 U1.23 U1.24 U1.27 U1.28 U1.29 U6.7 U6.13 U6.14 U7.7 U7.8 U7.9 U7.10 UART_USB1.6
copper on no net:
  other v4: 3582.76,5337.76 3630,5337.76 3677.24,5337.76 3582.76,5385 3630,5385 3677.24,5385 3582.76,5432.24 3630,5432.24 3677.24,5432.24

## Polygon pours and split planes (outlines as drawn)
GND on Top Layer "Top Layer-No Net" (hatched 45Degree grid 20 track 8, remove dead copper, pour order 4): 2362.2,7874.02 2362.21,7874.02 10236.22,7874.02 10236.22,3937.01 2362.2,3937.01
GND on Bottom Layer "Top Layer-No Net" (hatched 45Degree grid 20 track 8, remove dead copper, pour order 8): 2362.2,7874.02 2362.21,7874.02 10236.22,7874.02 10236.22,3937.01 2362.2,3937.01

## Keep-outs
Keep-Out Layer:
  the board outline again, w10

## Other copper
Top Layer:
  rectangle net +3.3V: 4290,6780 4365,7065
  rectangle net GND: 8650,7245 8920,7555
  rectangle net +3.3V: 8335,7600 8920,7680
  rectangle net GND: 8395,6060 8510,6260
  rectangle net GND: 9560,6260 9725,6370
  rectangle net +5V1: 9690,4890 9790,5720
  rectangle net +5V1: 9725,5155 10065,5720
  rectangle net NetC19_2: 9820,4750 10050,5090
  rectangle net NetC19_2: 9500,4615 9900,4825
  rectangle net GND: 9760,4295 10175,4575
  rectangle net NetD4_2: 9095,4395 9600,4580
  rectangle net GND: 3875,5865 4140,6405
  rectangle net +3.3V: 3145,6695 3850,6815
  rectangle net +3.3V: 3145,6780 4360,6975
  rectangle net +3.3V: 3145,6640 3850,6715
  rectangle net NetPOWER_LED1_2: 4060,6445 4155,6620
  rectangle net NetLED3_2: 3755,6440 3850,6620
  rectangle net NetLED2_2: 3455,6445 3540,6620
  rectangle net NetLED1_2: 3150,6440 3230,6620
  rectangle net GND: 2730,5455 3445,5775
  rectangle net +5V: 3540,5275 3570.94,5310
  rectangle net +5V: 3495,5275 3555,5330
  rectangle net +5V: 3490,4700 3680,4995
  rectangle net GND: 3165,4925 3300,5000
  rectangle net GND: 3025,4765 3255,5000
  rectangle net NetR11_2: 3925,5270 4100,5370
  rectangle net NetC12_1: 3415,5105 3550,5260
  rectangle net +5V: 3415,4925 3505,5075
  rectangle net GND: 3280,4925 3400,5260
  rectangle net GND: 3625,5025 4010,5080
  rectangle net +5V: 3590,4700 4010,4855
  rectangle net NetD3_1: 3290,4580 3460,4845
  rectangle net NetD3_1: 3300,4580 3660,4680
  rectangle net NetF1_1: 3550,4330 3655,4525
  rectangle net NetL2_1: 3415,4170 3660,4290
  rectangle net NetL2_1: 3150,3980 3485,4565
  rectangle net NetC21_1: 8840,4280 8915,4685
  rectangle net GND: 9540,3970 10175,4325
  rectangle net NetF3_1: 9165,5150 9660,5720
  rectangle net NetC19_2: 9350,4615 9605,4995
  rectangle net NetC19_2: 9105,4615 9600,5080
  rectangle net NetC19_2: 8840,4865 9145,4915
  rectangle net GND: 8685,4805 8915,4845
  rectangle net GND: 8700,4940 8920,4980
  rectangle net GND: 8700,4320 8830,4370
  rectangle net GND: 7965,4320 8740,5295
  rectangle net NetC21_1: 8375,3970 8915,4290
  rectangle net BATTERY_16: 9005,3970 9510,4330
Bottom Layer:
  rectangle net GND: 8230,4320 9560,5180
  rectangle net GND: 9540,3970 10175,5180
  rectangle net GND: 2730,5325 3330,5775
  rectangle net GND: 3290,5110 3380,5240
  rectangle net GND: 2845,5110 3335,5390
  rectangle net NetS2_2: 2765,3985 3075,4590

## Silkscreen, mask and mechanical layers (free items; w line width, h text height)
Top Overlay:
  text "transfer_2.3_2015.4.12" at 2770,7765 h50
  text "." at 4250,5625 h60
  text "." at 4250,5525 h60

## Text inside footprints (layer, text, board x,y; h text height)
C1: Top Overlay "+" at 8845,7785 h39.37 r270
C3: Top Overlay "+" at 3725,6785 h39.37 r90
C14: Top Overlay "+" at 4045,4710 h39.37 r90
C20: Top Overlay "+" at 9925,5060 h39.37 r270
C21: Top Overlay "+" at 8545,4025 h39.37 r90
C_1: Top Overlay "1" at 8610,6830 h39.37 r90; Top Overlay "2" at 8510,6830 h39.37 r90
C_2: Top Overlay "1" at 3980,7715 h39.37 r270; Top Overlay "2" at 4095,7730 h39.37 r270
Jcom: Top Overlay "6" at 2700.87,5871.73 h39.37 r90; Top Overlay "9" at 2700.87,6198.9 h39.37 r90; Top Overlay "5" at 2950,6355 h39.37 r90; Top Overlay "1" at 2950,5740 h39.37 r90